# EAGLE board CouplerRF_Quad_v1 (EAGLE 9.3.0)
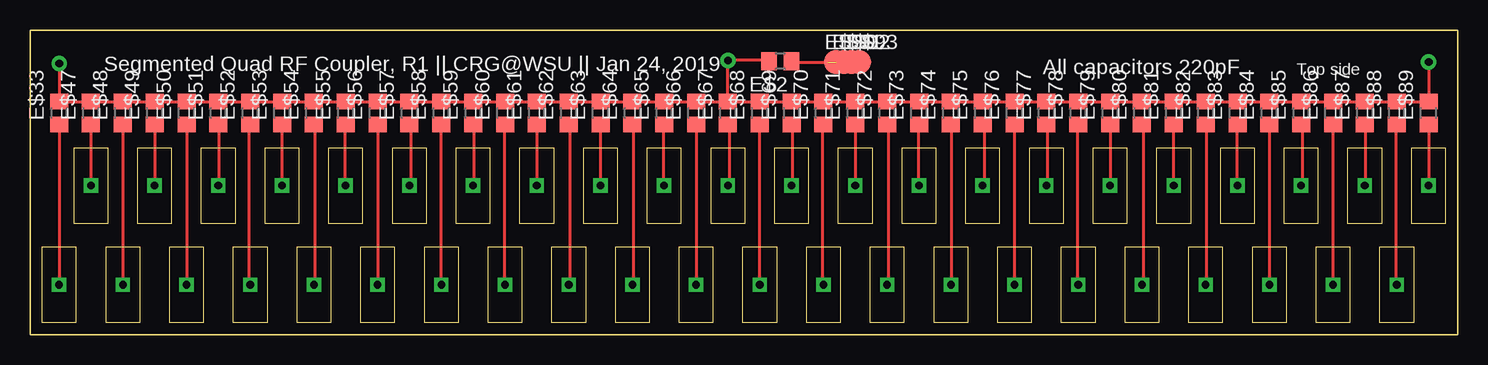
[diagram p0: board, top side]

Size 118.97 x 25.4 mm. Coordinates in mm from the lower left corner, seen from the top.
Outline: 0,0 118.97,0 118.97,25.4 0,25.4 0,0
Copper layers (1*16): Top 0.035mm / dielectric 1.5mm / Bottom 0.035mm
Design rules "default": minimum track width 10mil, minimum drill 24mil, track to track 8mil, track to pad 8mil, pad to pad 8mil, via to via 8mil, smd to smd 8mil, copper to edge 40mil, drill to drill 8mil, minimum pad ring 10mil, minimum via ring 8mil, stop-mask expansion 4mil, vias tented up to drill 0mil, thermal gap 10mil
Milling: 4 lines

## Footprints (pad centres in the part's own frame; a part is rotated, then mirrored left to right if it is on the bottom)
SLOT_QUAD_V1 = drill 0.635 pad 1.194 square: P$1 0,0
R0805 = smd 1.3 x 1.5: 1 -0.95,0; 2 0.95,0
TP20R = smd 2 x 2: TP 0,0

## Placement (x,y rotation side)
E$1  [SLOT_QUAD_V1]  2.43,4.17 90 top
E$2  [R0805]  62.52,22.8 180 top
E$3  [SLOT_QUAD_V1]  5.07,12.43 90 top
E$4  [SLOT_QUAD_V1]  7.74,4.17 90 top
E$5  [SLOT_QUAD_V1]  13.04,4.17 90 top
E$6  [SLOT_QUAD_V1]  18.35,4.17 90 top
E$7  [SLOT_QUAD_V1]  23.66,4.17 90 top
E$8  [SLOT_QUAD_V1]  10.38,12.43 90 top
E$9  [SLOT_QUAD_V1]  28.97,4.17 90 top
E$10  [SLOT_QUAD_V1]  15.69,12.43 90 top
E$11  [SLOT_QUAD_V1]  34.28,4.17 90 top
E$12  [SLOT_QUAD_V1]  39.58,4.17 90 top
E$13  [SLOT_QUAD_V1]  21,12.43 90 top
E$14  [SLOT_QUAD_V1]  44.89,4.17 90 top
E$15  [SLOT_QUAD_V1]  50.2,4.17 90 top
E$16  [SLOT_QUAD_V1]  55.51,4.17 90 top
E$17  [SLOT_QUAD_V1]  60.82,4.17 90 top
E$18  [SLOT_QUAD_V1]  26.3,12.43 90 top
E$19  [SLOT_QUAD_V1]  31.61,12.43 90 top
E$20  [SLOT_QUAD_V1]  66.12,4.17 90 top
E$21  [SLOT_QUAD_V1]  71.43,4.17 90 top
E$22  [SLOT_QUAD_V1]  76.74,4.17 90 top
E$23  [SLOT_QUAD_V1]  82.05,4.17 90 top
E$24  [SLOT_QUAD_V1]  87.36,4.17 90 top
E$25  [SLOT_QUAD_V1]  92.66,4.17 90 top
E$26  [SLOT_QUAD_V1]  97.97,4.17 90 top
E$27  [SLOT_QUAD_V1]  103.28,4.17 90 top
E$28  [SLOT_QUAD_V1]  108.59,4.17 90 top
E$29  [SLOT_QUAD_V1]  113.9,4.17 90 top
E$30  [SLOT_QUAD_V1]  36.92,12.43 90 top
E$31  [SLOT_QUAD_V1]  42.23,12.43 90 top
E$32  [SLOT_QUAD_V1]  47.54,12.43 90 top
E$33  [R0805]  2.43,18.48 90 top
E$34  [SLOT_QUAD_V1]  52.84,12.43 90 top
E$35  [SLOT_QUAD_V1]  58.15,12.43 90 top
E$36  [SLOT_QUAD_V1]  63.46,12.43 90 top
E$37  [SLOT_QUAD_V1]  68.77,12.43 90 top
E$38  [SLOT_QUAD_V1]  74.08,12.43 90 top
E$39  [SLOT_QUAD_V1]  79.39,12.43 90 top
E$40  [SLOT_QUAD_V1]  84.69,12.43 90 top
E$41  [SLOT_QUAD_V1]  90,12.43 90 top
E$42  [SLOT_QUAD_V1]  95.31,12.43 90 top
E$43  [SLOT_QUAD_V1]  100.62,12.43 90 top
E$44  [SLOT_QUAD_V1]  105.92,12.43 90 top
E$45  [SLOT_QUAD_V1]  111.23,12.43 90 top
E$46  [SLOT_QUAD_V1]  116.54,12.43 90 top
E$47  [R0805]  5.08,18.48 90 top
E$48  [R0805]  7.74,18.48 90 top
E$49  [R0805]  10.39,18.48 90 top
E$50  [R0805]  13.04,18.48 90 top
E$51  [R0805]  15.7,18.48 90 top
E$52  [R0805]  18.35,18.48 90 top
E$53  [R0805]  21.01,18.48 90 top
E$54  [R0805]  23.66,18.48 90 top
E$55  [R0805]  26.31,18.48 90 top
E$56  [R0805]  28.97,18.48 90 top
E$57  [R0805]  31.62,18.48 90 top
E$58  [R0805]  34.28,18.48 90 top
E$59  [R0805]  36.93,18.48 90 top
E$60  [R0805]  39.58,18.48 90 top
E$61  [R0805]  42.24,18.48 90 top
E$62  [R0805]  44.89,18.48 90 top
E$63  [R0805]  47.55,18.48 90 top
E$64  [R0805]  50.2,18.48 90 top
E$65  [R0805]  52.85,18.48 90 top
E$66  [R0805]  55.51,18.48 90 top
E$67  [R0805]  58.16,18.48 90 top
E$68  [R0805]  60.82,18.48 90 top
E$69  [R0805]  63.47,18.48 90 top
E$70  [R0805]  66.12,18.48 90 top
E$71  [R0805]  68.78,18.48 90 top
E$72  [R0805]  71.43,18.48 90 top
E$73  [R0805]  74.09,18.48 90 top
E$74  [R0805]  76.74,18.48 90 top
E$75  [R0805]  79.39,18.48 90 top
E$76  [R0805]  82.05,18.48 90 top
E$77  [R0805]  84.7,18.48 90 top
E$78  [R0805]  87.36,18.48 90 top
E$79  [R0805]  90.01,18.48 90 top
E$80  [R0805]  92.66,18.48 90 top
E$81  [R0805]  95.32,18.48 90 top
E$82  [R0805]  97.97,18.48 90 top
E$83  [R0805]  100.63,18.48 90 top
E$84  [R0805]  103.28,18.48 90 top
E$85  [R0805]  105.93,18.48 90 top
E$86  [R0805]  108.59,18.48 90 top
E$87  [R0805]  111.24,18.48 90 top
E$88  [R0805]  113.9,18.48 90 top
E$89  [R0805]  116.55,18.48 90 top
E$90  [TP20R]  67.18,22.73 0 top
E$91  [TP20R]  67.82,22.73 0 top
E$92  [TP20R]  68.45,22.73 0 top
E$93  [TP20R]  69.09,22.73 0 top

## Library data of the parts
E$1 E$3-E$32 E$34-E$46 = SLOTS_Quad
E$2 E$33 E$47-E$89 = GAAextensions
E$90-E$93 = testpad

## Nets
S$1: E$1.P$1 E$33.1
S$51: E$10.P$1 E$51.1
S$52: E$3.P$1 E$47.1
S$53: E$4.P$1 E$48.1
S$54: E$8.P$1 E$49.1
S$55: E$5.P$1 E$50.1
S$56: E$6.P$1 E$52.1
S$57: E$13.P$1 E$53.1
S$58: E$7.P$1 E$54.1
S$59: E$18.P$1 E$55.1
S$60: E$9.P$1 E$56.1
S$61: E$19.P$1 E$57.1
S$62: E$11.P$1 E$58.1
S$63: E$30.P$1 E$59.1
S$64: E$12.P$1 E$60.1
S$65: E$31.P$1 E$61.1
S$66: E$14.P$1 E$62.1
S$67: E$32.P$1 E$63.1
S$68: E$15.P$1 E$64.1
S$69: E$34.P$1 E$65.1
S$70: E$16.P$1 E$66.1
S$71: E$35.P$1 E$67.1
S$72: E$17.P$1 E$68.1
S$73: E$2.2 E$33.2 E$47.2 E$48.2 E$49.2 E$50.2 E$51.2 E$52.2 E$53.2 E$54.2 E$55.2 E$56.2 E$57.2 E$58.2 E$59.2 E$60.2 E$61.2 E$62.2 E$63.2 E$64.2 E$65.2 E$66.2 E$67.2 E$68.2 E$69.2 E$70.2 E$71.2 E$72.2 E$73.2 E$74.2 E$75.2 E$76.2 E$77.2 E$78.2 E$79.2 E$80.2 E$81.2 E$82.2 E$83.2 E$84.2 E$85.2 E$86.2 E$87.2 E$88.2 E$89.2
S$74: E$46.P$1 E$89.1
S$75: E$29.P$1 E$88.1
S$76: E$45.P$1 E$87.1
S$77: E$28.P$1 E$86.1
S$78: E$44.P$1 E$85.1
S$79: E$27.P$1 E$84.1
S$80: E$43.P$1 E$83.1
S$81: E$26.P$1 E$82.1
S$82: E$42.P$1 E$81.1
S$83: E$25.P$1 E$80.1
S$84: E$41.P$1 E$79.1
S$85: E$24.P$1 E$78.1
S$86: E$40.P$1 E$77.1
S$87: E$23.P$1 E$76.1
S$88: E$39.P$1 E$75.1
S$89: E$22.P$1 E$74.1
S$90: E$38.P$1 E$73.1
S$91: E$21.P$1 E$72.1
S$92: E$37.P$1 E$71.1
S$93: E$36.P$1 E$69.1
S$94: E$20.P$1 E$70.1
S$95: E$2.1 E$90.TP

## Tracks (layer width: path | path; a pad name or v marks a point on that pad's centre or on a via)
S$1
  Top 0.254: E$33.1 E$1.P$1
S$51
  Top 0.254: E$51.1 15.77,17.35 15.77,12.55 E$10.P$1
S$52
  Top 0.254: E$47.1 5.08,12.44 E$3.P$1
S$53
  Top 0.254: E$48.1 E$4.P$1
S$54
  Top 0.254: E$49.1 E$8.P$1
S$55
  Top 0.254: E$50.1 E$5.P$1
S$56
  Top 0.254: E$52.1 18.29,17.35 18.29,4.32 E$6.P$1
S$57
  Top 0.254: E$53.1 21.03,17.35 21.03,12.55 E$13.P$1
S$58
  Top 0.254: E$54.1 23.77,17.35 23.77,4.32 E$7.P$1
S$59
  Top 0.254: E$55.1 26.29,17.35 26.29,12.55 E$18.P$1
S$60
  Top 0.254: E$56.1 29.03,17.35 29.03,4.32 E$9.P$1
S$61
  Top 0.254: E$57.1 31.77,17.35 31.77,12.55 E$19.P$1
S$62
  Top 0.254: E$58.1 34.29,17.35 34.29,4.32 E$11.P$1
S$63
  Top 0.254: E$59.1 37.03,17.35 37.03,12.55 E$30.P$1
S$64
  Top 0.254: E$60.1 39.55,17.35 39.55,4.32 E$12.P$1
S$65
  Top 0.254: E$61.1 42.29,17.35 42.29,12.55 E$31.P$1
S$66
  Top 0.254: E$62.1 45.03,17.35 45.03,4.32 E$14.P$1
S$67
  Top 0.254: E$63.1 47.55,17.35 47.55,12.55 E$32.P$1
S$68
  Top 0.254: E$64.1 50.29,17.35 50.29,4.32 E$15.P$1
S$69
  Top 0.254: E$65.1 52.81,17.35 52.81,12.55 E$34.P$1
S$70
  Top 0.254: E$66.1 55.55,17.35 55.55,4.32 E$16.P$1
S$71
  Top 0.254: E$67.1 58.29,17.35 58.29,12.55 E$35.P$1
S$72
  Top 0.254: E$68.1 60.81,17.35 60.81,4.32 E$17.P$1
S$73  (via drill 0.65 pad 1.27)
  Top 0.254: 5.03,19.43 E$33.2 v2.43,22.61 | 5.03,19.43 E$47.2 | E$47.2 E$48.2 | E$48.2 7.77,19.43 | 7.77,19.43 E$49.2 | E$49.2 10.52,19.43 | 10.52,19.43 E$50.2 | E$50.2 | E$50.2 E$51.2 | E$51.2 15.77,19.43 | 15.77,19.43 18.29,19.43 | 18.29,19.43 E$52.2 | E$52.2 E$53.2 | E$53.2 21.03,19.43 | 21.03,19.43 E$54.2 | E$54.2 23.77,19.43 | 23.77,19.43 26.29,19.43 | 26.29,19.43 E$55.2 | E$55.2 E$56.2 | E$56.2 29.03,19.43 | 29.03,19.43 E$57.2 | E$57.2 31.77,19.43 | 31.77,19.43 E$58.2 | E$58.2 | E$58.2 E$59.2 | E$59.2 37.03,19.43 | 37.03,19.43 39.55,19.43 | 39.55,19.43 E$60.2 | E$60.2 E$61.2 | E$61.2 42.29,19.43 | 42.29,19.43 E$62.2 | E$62.2 45.03,19.43 | 45.03,19.43 E$63.2 | E$63.2 | E$63.2 E$64.2 | E$64.2 50.29,19.43 | 50.29,19.43 52.81,19.43 | 52.81,19.43 E$65.2 | E$65.2 E$66.2 | E$66.2 55.55,19.43 | 55.55,19.43 E$67.2 | E$67.2 58.29,19.43 | 58.29,19.43 60.81,19.43 | 60.81,19.43 E$68.2 | E$68.2 E$69.2 | E$69.2 63.55,19.43 | 63.55,19.43 66.06,19.43 | 66.06,19.43 E$70.2 | E$70.2 E$71.2 | E$71.2 68.81,19.43 | 68.81,19.43 E$72.2 | E$72.2 71.55,19.43 | 71.55,19.43 74.07,19.43 | 74.07,19.43 E$73.2 | E$73.2 E$74.2 | E$74.2 76.81,19.43 | 76.81,19.43 E$75.2 | E$75.2 79.55,19.43 | 79.55,19.43 E$76.2 | E$76.2 82.07,19.43 | 82.07,19.43 E$77.2 | E$77.2 84.81,19.43 | 84.81,19.43 87.33,19.43 | 87.33,19.43 E$78.2 | E$78.2 E$79.2 | E$79.2 90.07,19.43 | 90.07,19.43 E$80.2 | E$80.2 92.81,19.43 | 92.81,19.43 E$81.2 | E$81.2 | E$81.2 E$82.2 | E$82.2 98.07,19.43 | 98.07,19.43 100.58,19.43 | 100.58,19.43 E$83.2 | E$83.2 E$84.2 | E$84.2 103.33,19.43 | 103.33,19.43 E$85.2 | E$85.2 106.07,19.43 | 106.07,19.43 E$86.2 | E$86.2 | E$86.2 E$87.2 | E$87.2 111.33,19.43 | 111.33,19.43 113.84,19.43 | 113.84,19.43 E$88.2 | E$88.2 E$89.2 v116.55,22.73 | E$47.2 5.03,19.41 5.03,19.43 | 60.81,19.43 60.81,19.41 E$68.2
  Top 0.254: E$48.2 7.77,19.41 7.77,19.43 | E$49.2 10.52,19.41 10.52,19.43 | E$50.2 13.03,19.41 E$50.2 | E$51.2 15.77,19.41 15.77,19.43 | E$52.2 18.29,19.41 18.29,19.43 | E$53.2 21.03,19.41 21.03,19.43 | E$54.2 23.77,19.41 23.77,19.43 | E$55.2 26.29,19.41 26.29,19.43 | E$56.2 29.03,19.41 29.03,19.43 | E$57.2 31.77,19.41 31.77,19.43 | E$58.2 34.29,19.41 E$58.2 | E$59.2 37.03,19.41 37.03,19.43 | E$60.2 39.55,19.41 39.55,19.43 | E$61.2 42.29,19.41 42.29,19.43 | E$62.2 45.03,19.41 45.03,19.43 | E$63.2 47.55,19.41 E$63.2 | E$64.2 50.29,19.41 50.29,19.43 | E$65.2 52.81,19.41 52.81,19.43 | E$66.2 55.55,19.41 55.55,19.43 | E$67.2 58.29,19.41 58.29,19.43 | E$69.2 63.55,19.41 63.55,19.43 | E$70.2 66.06,19.41 66.06,19.43 | E$71.2 68.81,19.41 68.81,19.43 | E$72.2 71.55,19.41 71.55,19.43 | E$73.2 74.07,19.41 74.07,19.43 | E$74.2 76.81,19.41 76.81,19.43 | E$75.2 79.55,19.41 79.55,19.43 | E$76.2 82.07,19.41 82.07,19.43 | E$77.2 84.81,19.41 84.81,19.43 | E$78.2 87.33,19.41 87.33,19.43 | E$79.2 90.07,19.41 90.07,19.43 | E$80.2 92.81,19.41 92.81,19.43 | E$81.2 95.33,19.41 E$81.2 | E$82.2 98.07,19.41 98.07,19.43 | E$83.2 100.58,19.41 100.58,19.43 | E$84.2 103.33,19.41 103.33,19.43 | E$85.2 106.07,19.41 106.07,19.43 | E$86.2 108.58,19.41 E$86.2 | E$87.2 111.33,19.41 111.33,19.43 | E$88.2 113.84,19.41 113.84,19.43 | E$67.2 v58.16,22.86 61.51,22.86 E$2.2
S$74
  Top 0.254: E$89.1 116.59,17.35 116.59,12.55 E$46.P$1
S$75
  Top 0.254: E$88.1 113.84,17.35 113.84,4.32 E$29.P$1
S$76
  Top 0.254: E$87.1 111.33,17.35 111.33,12.55 E$45.P$1
S$77
  Top 0.254: E$86.1 108.58,17.35 108.58,4.32 E$28.P$1
S$78
  Top 0.254: E$85.1 106.07,17.35 106.07,12.55 E$44.P$1
S$79
  Top 0.254: E$84.1 103.33,17.35 103.33,4.32 E$27.P$1
S$80
  Top 0.254: E$83.1 100.58,17.35 100.58,12.55 E$43.P$1
S$81
  Top 0.254: E$82.1 98.07,17.35 98.07,4.32 E$26.P$1
S$82
  Top 0.254: E$81.1 95.33,17.35 95.33,12.55 E$42.P$1
S$83
  Top 0.254: E$80.1 92.81,17.35 92.81,4.32 E$25.P$1
S$84
  Top 0.254: E$79.1 90.07,17.35 90.07,12.55 E$41.P$1
S$85
  Top 0.254: E$78.1 87.33,17.35 87.33,4.32 E$24.P$1
S$86
  Top 0.254: E$77.1 84.81,17.35 84.81,12.55 E$40.P$1
S$87
  Top 0.254: E$76.1 82.07,17.35 82.07,4.32 E$23.P$1
S$88
  Top 0.254: E$75.1 79.55,17.35 79.55,12.55 E$39.P$1
S$89
  Top 0.254: E$74.1 76.81,17.35 76.81,4.32 E$22.P$1
S$90
  Top 0.254: E$73.1 74.07,17.35 74.07,12.55 E$38.P$1
S$91
  Top 0.254: E$72.1 71.55,17.35 71.55,4.32 E$21.P$1
S$92
  Top 0.254: E$71.1 68.81,17.35 68.81,12.55 E$37.P$1
S$93
  Top 0.254: E$69.1 63.55,17.35 63.55,12.55 E$36.P$1
S$94
  Top 0.254: E$70.1 66.06,17.35 66.06,4.32 E$20.P$1
S$95  (1 unrouted)
  Top 0.254: E$2.1 63.54,22.73 66.49,22.73

## Text on the board
tPlace: Segmented Quad RF Coupler, R1 || CRG@WSU || Jan 24, 2019 | All capacitors 220pF | Top side